# EAGLE board SparkFun_USB_LiPolyCharger_SingleCell_Panel_v20 (EAGLE 6.5.0)
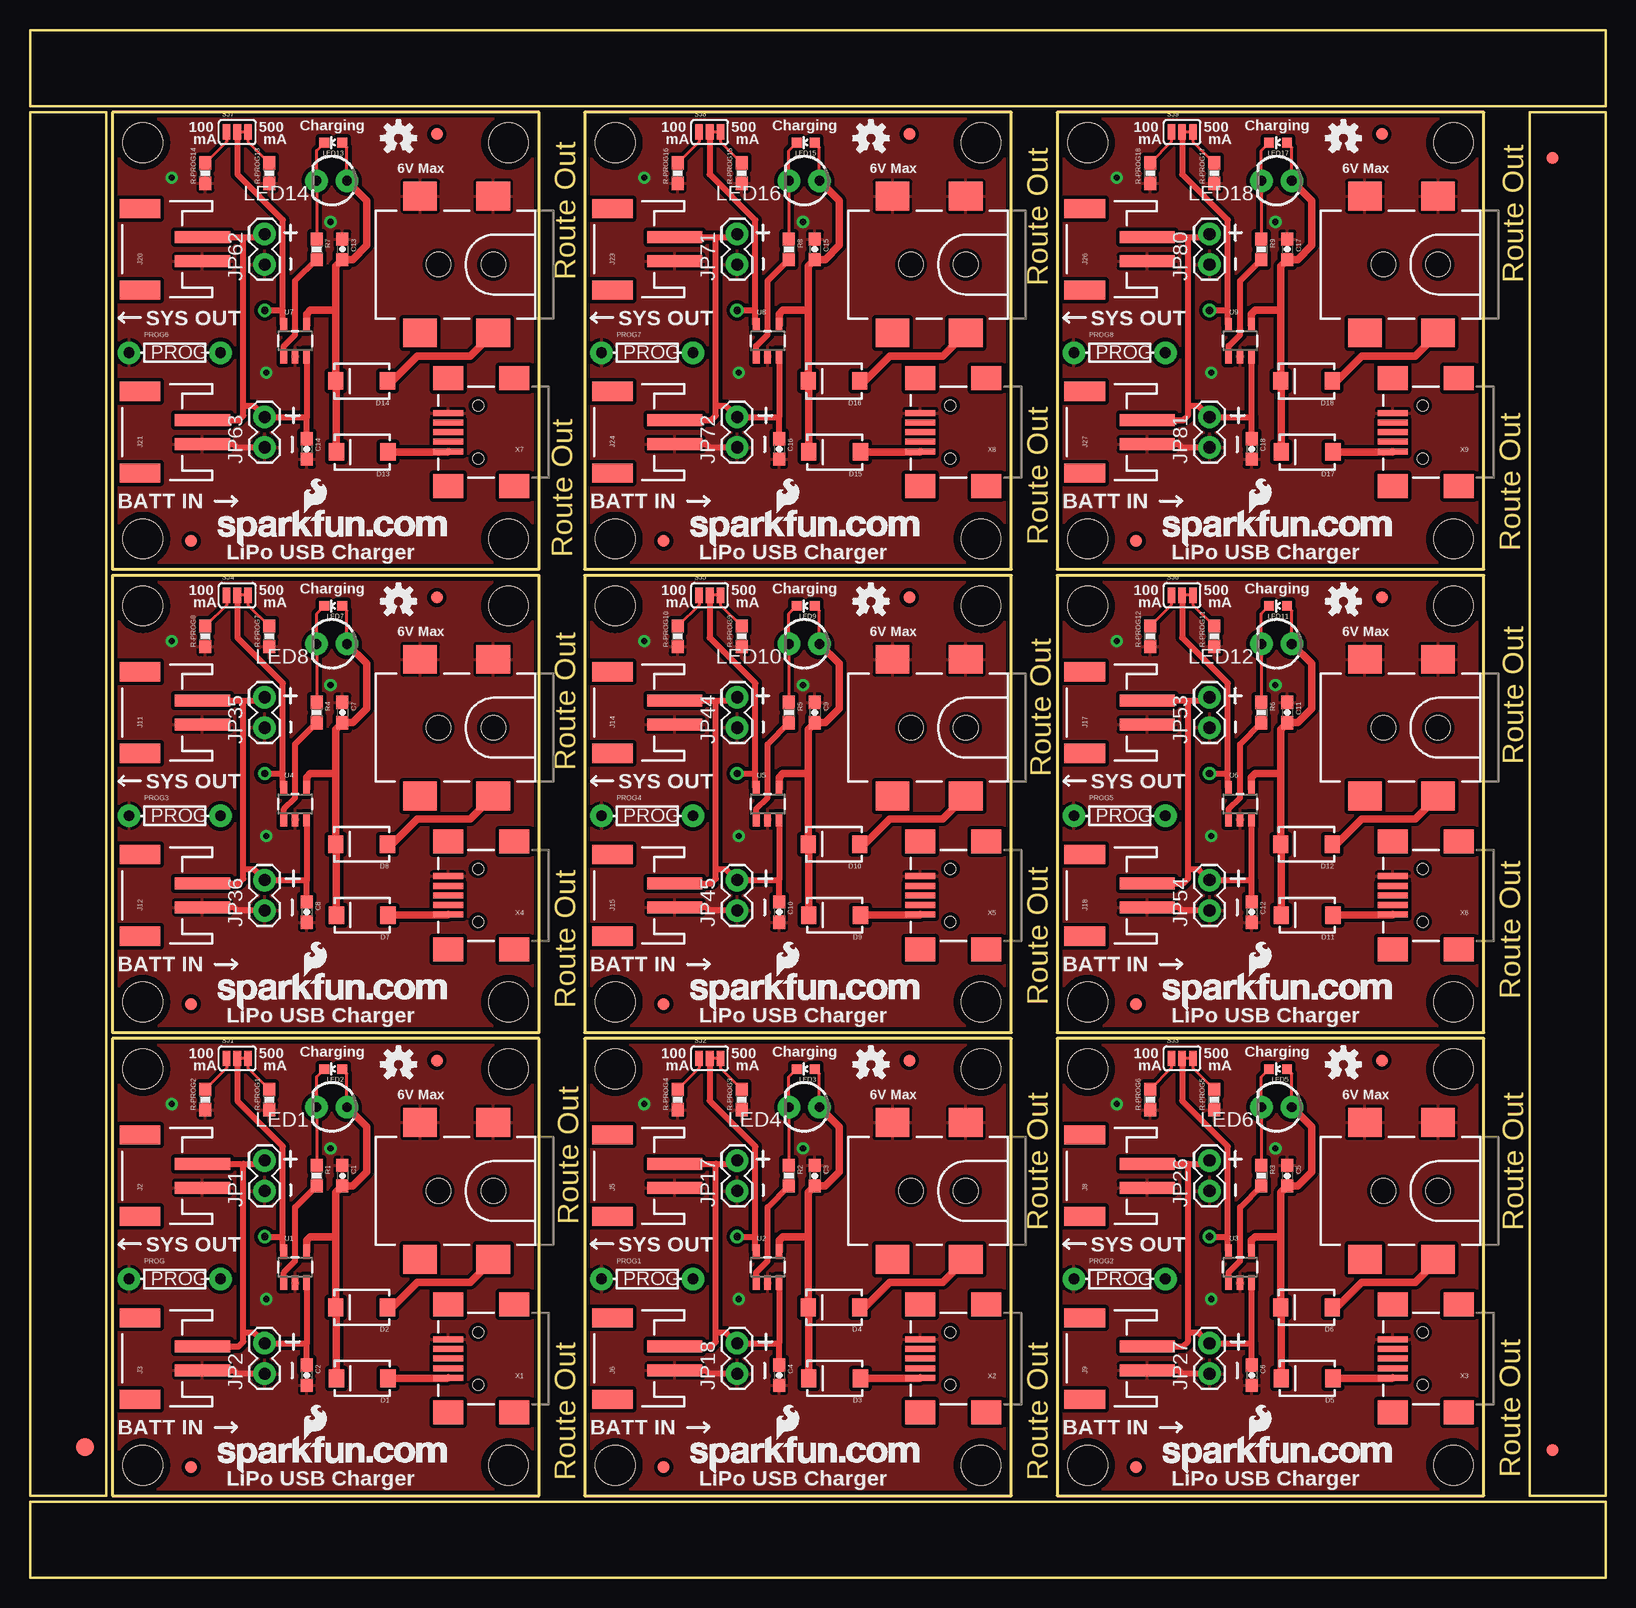
[diagram p0: board, top side]
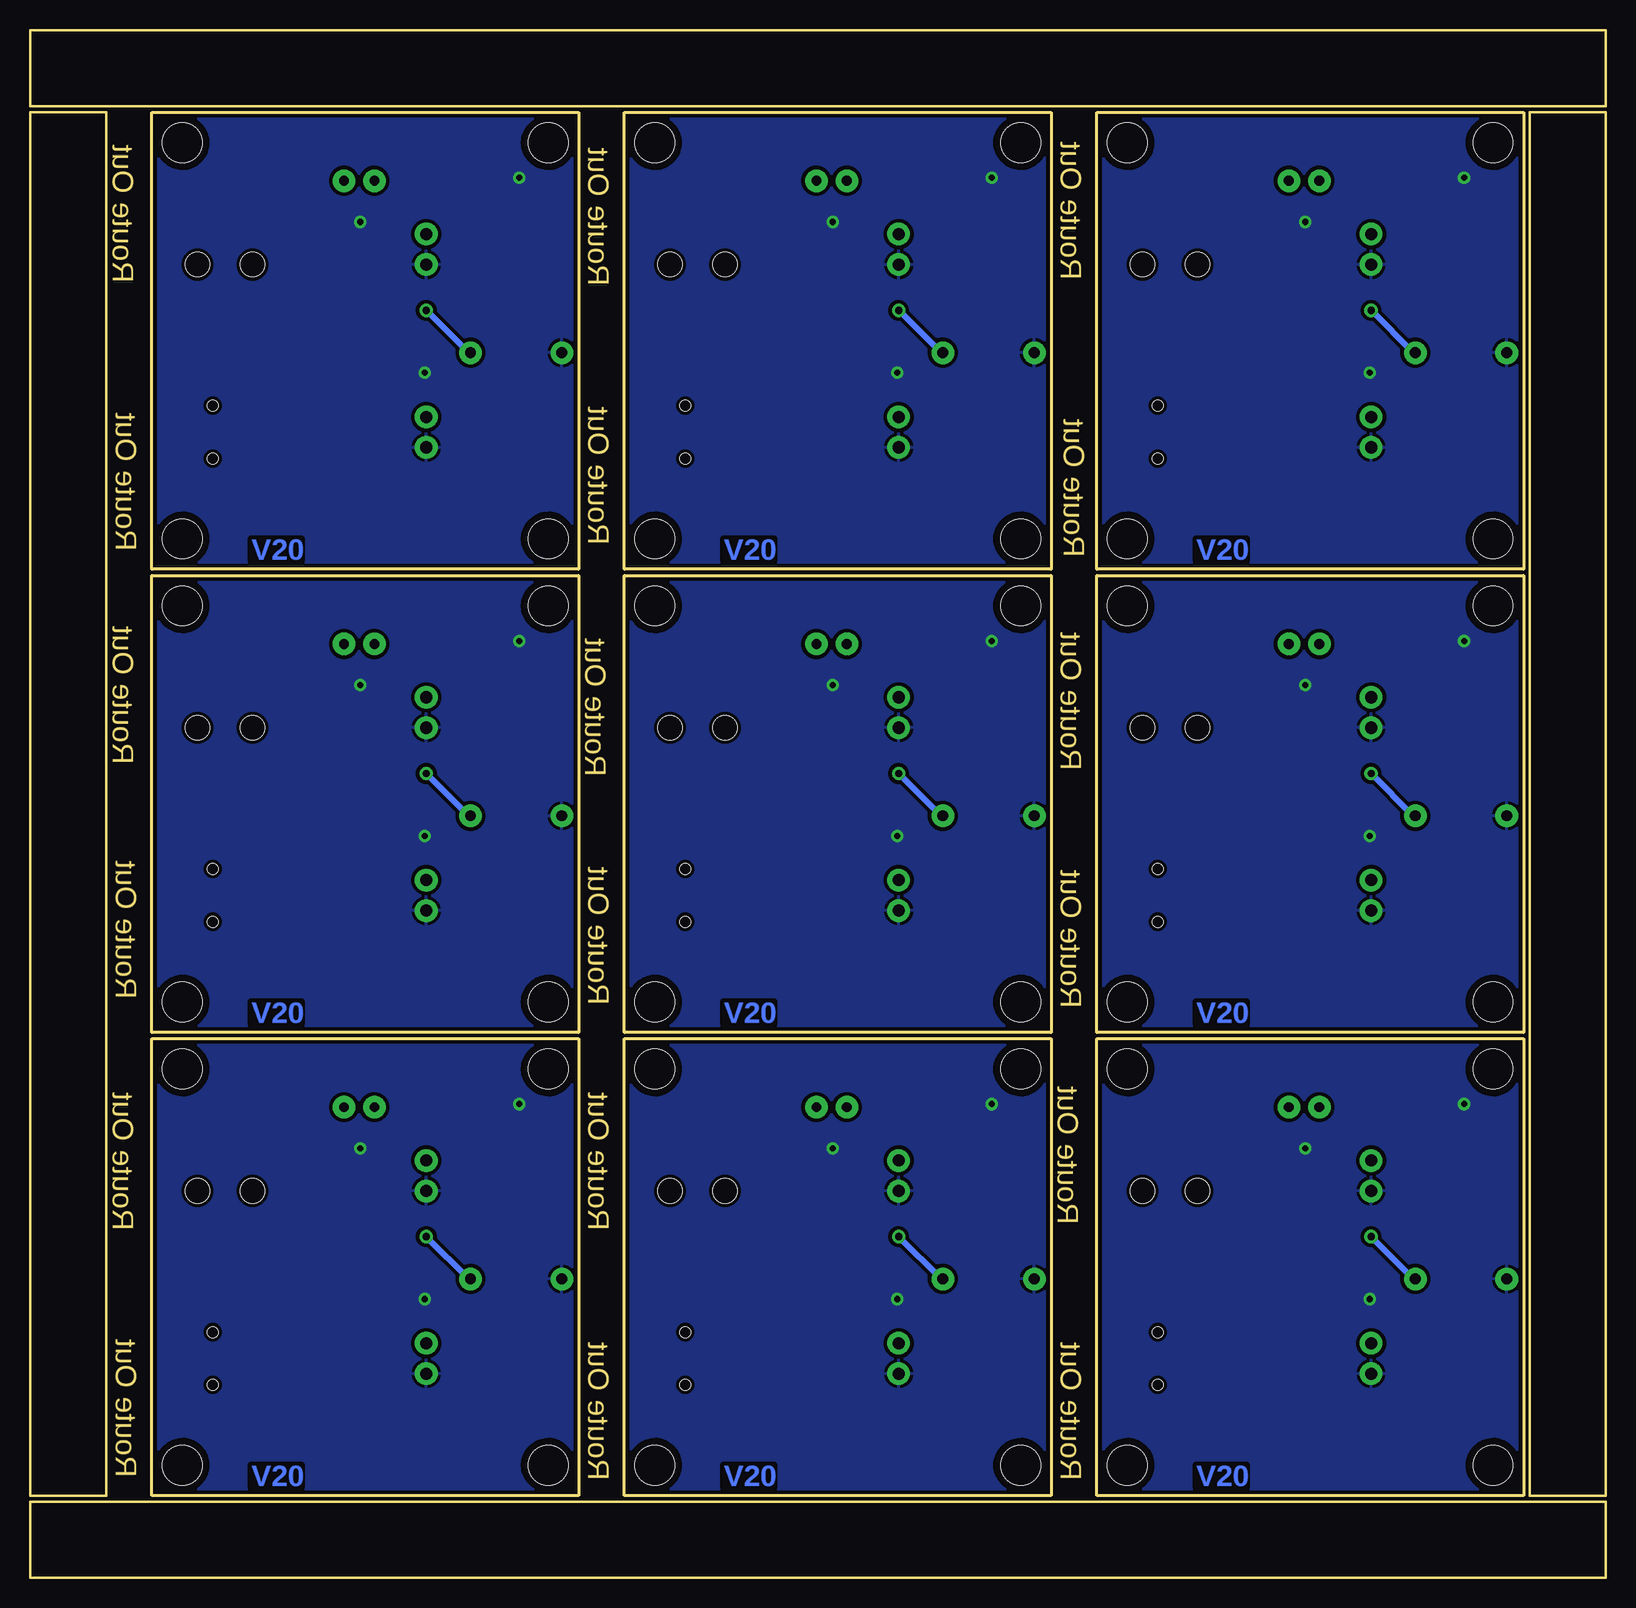
[diagram p1: board, bottom side, seen from below]

Size 131.32 x 129.03 mm. Coordinates in mm from the lower left corner, seen from the top.
Outline: 6.86,6.86 42.42,6.86 42.42,44.96 6.86,44.96 6.86,6.86
Outline: 46.23,6.86 81.79,6.86 81.79,44.96 46.23,44.96 46.23,6.86
Outline: 85.6,6.86 121.16,6.86 121.16,44.96 85.6,44.96 85.6,6.86
Outline: 6.86,45.47 42.42,45.47 42.42,83.57 6.86,83.57 6.86,45.47
Outline: 46.23,45.47 81.79,45.47 81.79,83.57 46.23,83.57 46.23,45.47
Outline: 85.6,45.47 121.16,45.47 121.16,83.57 85.6,83.57 85.6,45.47
Outline: 6.86,84.07 42.42,84.07 42.42,122.17 6.86,122.17 6.86,84.07
Outline: 46.23,84.07 81.79,84.07 81.79,122.17 46.23,122.17 46.23,84.07
Outline: 85.6,84.07 121.16,84.07 121.16,122.17 85.6,122.17 85.6,84.07
Outline: 6.35,6.86 6.35,122.17 0,122.17 0,6.86 6.35,6.86
Outline: 0,0 131.32,0 131.32,6.35 0,6.35 0,0
Outline: 131.32,6.86 131.32,122.17 124.97,122.17 124.97,6.86 131.32,6.86
Outline: 131.32,129.03 0,129.03 0,122.68 131.32,122.68 131.32,129.03
Copper layers (1*16): Top 0.035mm / dielectric 1.5mm / Bottom 0.035mm
Design rules "SparkFun *": minimum track width 8mil, minimum drill 20mil, track to track 8mil, track to pad 8mil, pad to pad 8mil, via to via 8mil, smd to smd 8mil, copper to edge 8mil, drill to drill 8mil, minimum pad ring 12mil, minimum via ring 10mil, stop-mask expansion 4mil, vias tented up to drill 20mil, thermal gap 10mil

## Footprints (pad centres in the part's own frame; a part is rotated, then mirrored left to right if it is on the bottom)
0603-CAP = smd 1.1 x 1: 1 -0.85,0; 2 0.85,0
SMA-DIODE = smd 1.27 x 1.47: A -2.15,0; C 2.15,0
FIDUCIAL-1.5X3 = smd 1.5 x 1.5: 1 0,0
FIDUCIAL-1X2 = smd 1 x 1: 1 0,0
POWER_JACK_SMD = smd 2.8 x 2.4: GND 0,-5.7; P$4 6.1,-5.7; VIN0 0,5.7; VIN1 6.1,5.7 | hole 2.032: 0,0; 4.572,0
JST-2-SMD = smd 1 x 4.6: 1 -1,-3.7; 2 1,-3.7 | smd 1.6 x 3.4: NC1 -3.4,1.5; NC2 3.4,1.5
1X02 = drill 1.016 pad 1.88: 1 0,0; 2 2.54,0
STAND-OFF = hole 3.302: 0,0
LED3MM = drill 0.813 pad 1.88: A -1.27,0; K 1.27,0
LED-0603 = smd 0.8 x 0.8: A 0,-0.75; C 0,0.75
AXIAL-0.3 = drill 0.9 pad 1.88: P$1 -3.81,0; P$2 3.81,0
0603-RES = smd 1.1 x 1: 1 -0.85,0; 2 0.85,0
SJ_3 = smd 0.635 x 1.27: 1 -0.889,0; 2 0,0; 3 0.889,0
SOT23-5 = smd 0.55 x 1.2: 1 -0.95,-1.3; 2 0,-1.3; 3 0.95,-1.3; 4 0.95,1.3; 5 -0.95,1.3
USB-MINIB = smd 2.5 x 0.5: D+ 2.5,0; D- 2.5,0.8; GND 2.5,-1.6; ID 2.5,-0.8; VBUS 2.5,1.6 | smd 2.5 x 2: MTN1 -3,4.5; MTN2 2.5,4.5; MTN3 -3,-4.5; MTN4 2.5,-4.5 | hole 0.9: 0,2.2; 0,-2.2

## Placement (x,y rotation side)
C1  4.7uF  [0603-CAP]  26.04,33.53 270 top
C2  4.7uF  [0603-CAP]  23.06,16.89 270 top
C3  4.7uF  [0603-CAP]  65.41,33.53 270 top
C4  4.7uF  [0603-CAP]  62.43,16.89 270 top
C5  4.7uF  [0603-CAP]  104.78,33.53 270 top
C6  4.7uF  [0603-CAP]  101.8,16.89 270 top
C7  4.7uF  [0603-CAP]  26.04,72.14 270 top
C8  4.7uF  [0603-CAP]  23.06,55.5 270 top
C9  4.7uF  [0603-CAP]  65.41,72.14 270 top
C10  4.7uF  [0603-CAP]  62.43,55.5 270 top
C11  4.7uF  [0603-CAP]  104.78,72.14 270 top
C12  4.7uF  [0603-CAP]  101.8,55.5 270 top
C13  4.7uF  [0603-CAP]  26.04,110.74 270 top
C14  4.7uF  [0603-CAP]  23.06,94.11 270 top
C15  4.7uF  [0603-CAP]  65.41,110.74 270 top
C16  4.7uF  [0603-CAP]  62.43,94.11 270 top
C17  4.7uF  [0603-CAP]  104.78,110.74 270 top
C18  4.7uF  [0603-CAP]  101.8,94.11 270 top
D1  MBRA140  [SMA-DIODE]  27.69,16.64 180 top
D2  MBRA140  [SMA-DIODE]  27.64,22.56 180 top
D3  MBRA140  [SMA-DIODE]  67.06,16.64 180 top
D4  MBRA140  [SMA-DIODE]  67.01,22.56 180 top
D5  MBRA140  [SMA-DIODE]  106.43,16.64 180 top
D6  MBRA140  [SMA-DIODE]  106.38,22.56 180 top
D7  MBRA140  [SMA-DIODE]  27.69,55.24 180 top
D8  MBRA140  [SMA-DIODE]  27.64,61.16 180 top
D9  MBRA140  [SMA-DIODE]  67.06,55.24 180 top
D10  MBRA140  [SMA-DIODE]  67.01,61.16 180 top
D11  MBRA140  [SMA-DIODE]  106.43,55.24 180 top
D12  MBRA140  [SMA-DIODE]  106.38,61.16 180 top
D13  MBRA140  [SMA-DIODE]  27.69,93.85 180 top
D14  MBRA140  [SMA-DIODE]  27.64,99.77 180 top
D15  MBRA140  [SMA-DIODE]  67.06,93.85 180 top
D16  MBRA140  [SMA-DIODE]  67.01,99.77 180 top
D17  MBRA140  [SMA-DIODE]  106.43,93.85 180 top
D18  MBRA140  [SMA-DIODE]  106.38,99.77 180 top
E$1  [FIDUCIAL-1.5X3]  4.57,10.92 0 top
E$4  [FIDUCIAL-1X2]  126.87,10.67 0 top
E$5  [FIDUCIAL-1X2]  126.87,118.36 180 top
J1  POWER_JACKSMD  [POWER_JACK_SMD]  38.61,32.26 180 top
J2  [JST-2-SMD]  10.67,33.53 90 top
J3  [JST-2-SMD]  10.67,18.29 90 top
J4  POWER_JACKSMD  [POWER_JACK_SMD]  77.98,32.26 180 top
J5  [JST-2-SMD]  50.04,33.53 90 top
J6  [JST-2-SMD]  50.04,18.29 90 top
J7  POWER_JACKSMD  [POWER_JACK_SMD]  117.35,32.26 180 top
J8  [JST-2-SMD]  89.41,33.53 90 top
J9  [JST-2-SMD]  89.41,18.29 90 top
J10  POWER_JACKSMD  [POWER_JACK_SMD]  38.61,70.87 180 top
J11  [JST-2-SMD]  10.67,72.14 90 top
J12  [JST-2-SMD]  10.67,56.9 90 top
J13  POWER_JACKSMD  [POWER_JACK_SMD]  77.98,70.87 180 top
J14  [JST-2-SMD]  50.04,72.14 90 top
J15  [JST-2-SMD]  50.04,56.9 90 top
J16  POWER_JACKSMD  [POWER_JACK_SMD]  117.35,70.87 180 top
J17  [JST-2-SMD]  89.41,72.14 90 top
J18  [JST-2-SMD]  89.41,56.9 90 top
J19  POWER_JACKSMD  [POWER_JACK_SMD]  38.61,109.47 180 top
J20  [JST-2-SMD]  10.67,110.74 90 top
J21  [JST-2-SMD]  10.67,95.5 90 top
J22  POWER_JACKSMD  [POWER_JACK_SMD]  77.98,109.47 180 top
J23  [JST-2-SMD]  50.04,110.74 90 top
J24  [JST-2-SMD]  50.04,95.5 90 top
J25  POWER_JACKSMD  [POWER_JACK_SMD]  117.35,109.47 180 top
J26  [JST-2-SMD]  89.41,110.74 90 top
J27  [JST-2-SMD]  89.41,95.5 90 top
JP1  M02PTH  [1X02]  19.56,32.26 90 top
JP2  M02PTH  [1X02]  19.56,17.02 90 top
JP3  STAND-OFF  [STAND-OFF]  48.77,42.42 0 top
JP4  STAND-OFF  [STAND-OFF]  79.25,42.42 0 top
JP5  STAND-OFF  [STAND-OFF]  79.25,9.4 0 top
JP6  STAND-OFF  [STAND-OFF]  48.77,9.4 0 top
JP7  STAND-OFF  [STAND-OFF]  39.88,9.4 0 top
JP8  STAND-OFF  [STAND-OFF]  9.4,42.42 0 top
JP9  STAND-OFF  [STAND-OFF]  9.4,9.4 0 top
JP10  STAND-OFF  [STAND-OFF]  39.88,42.42 0 top
JP11  LOGO-SFENEW  [SFE-NEW-WEBLOGO]  15.65,8.69 0 top
JP12  FIDUCIAL1X2  [FIDUCIAL-1X2]  13.44,9.22 0 top
JP13  FIDUCIAL1X2  [FIDUCIAL-1X2]  33.91,43.13 0 top
JP14  LOGO-SFENEW  [SFE-NEW-WEBLOGO]  55.02,8.69 0 top
JP15  FIDUCIAL1X2  [FIDUCIAL-1X2]  52.81,9.22 0 top
JP16  FIDUCIAL1X2  [FIDUCIAL-1X2]  73.28,43.13 0 top
JP17  M02PTH  [1X02]  58.93,32.26 90 top
JP18  M02PTH  [1X02]  58.93,17.02 90 top
JP19  STAND-OFF  [STAND-OFF]  88.14,42.42 0 top
JP20  STAND-OFF  [STAND-OFF]  118.62,42.42 0 top
JP21  STAND-OFF  [STAND-OFF]  118.62,9.4 0 top
JP22  STAND-OFF  [STAND-OFF]  88.14,9.4 0 top
JP23  LOGO-SFENEW  [SFE-NEW-WEBLOGO]  94.39,8.69 0 top
JP24  FIDUCIAL1X2  [FIDUCIAL-1X2]  92.18,9.22 0 top
JP25  FIDUCIAL1X2  [FIDUCIAL-1X2]  112.65,43.13 0 top
JP26  M02PTH  [1X02]  98.3,32.26 90 top
JP27  M02PTH  [1X02]  98.3,17.02 90 top
JP28  STAND-OFF  [STAND-OFF]  9.4,81.03 0 top
JP29  STAND-OFF  [STAND-OFF]  39.88,81.03 0 top
JP30  STAND-OFF  [STAND-OFF]  39.88,48.01 0 top
JP31  STAND-OFF  [STAND-OFF]  9.4,48.01 0 top
JP32  LOGO-SFENEW  [SFE-NEW-WEBLOGO]  15.65,47.29 0 top
JP33  FIDUCIAL1X2  [FIDUCIAL-1X2]  13.44,47.83 0 top
JP34  FIDUCIAL1X2  [FIDUCIAL-1X2]  33.91,81.74 0 top
JP35  M02PTH  [1X02]  19.56,70.87 90 top
JP36  M02PTH  [1X02]  19.56,55.63 90 top
JP37  STAND-OFF  [STAND-OFF]  48.77,81.03 0 top
JP38  STAND-OFF  [STAND-OFF]  79.25,81.03 0 top
JP39  STAND-OFF  [STAND-OFF]  79.25,48.01 0 top
JP40  STAND-OFF  [STAND-OFF]  48.77,48.01 0 top
JP41  LOGO-SFENEW  [SFE-NEW-WEBLOGO]  55.02,47.29 0 top
JP42  FIDUCIAL1X2  [FIDUCIAL-1X2]  52.81,47.83 0 top
JP43  FIDUCIAL1X2  [FIDUCIAL-1X2]  73.28,81.74 0 top
JP44  M02PTH  [1X02]  58.93,70.87 90 top
JP45  M02PTH  [1X02]  58.93,55.63 90 top
JP46  STAND-OFF  [STAND-OFF]  88.14,81.03 0 top
JP47  STAND-OFF  [STAND-OFF]  118.62,81.03 0 top
JP48  STAND-OFF  [STAND-OFF]  118.62,48.01 0 top
JP49  STAND-OFF  [STAND-OFF]  88.14,48.01 0 top
JP50  LOGO-SFENEW  [SFE-NEW-WEBLOGO]  94.39,47.29 0 top
JP51  FIDUCIAL1X2  [FIDUCIAL-1X2]  92.18,47.83 0 top
JP52  FIDUCIAL1X2  [FIDUCIAL-1X2]  112.65,81.74 0 top
JP53  M02PTH  [1X02]  98.3,70.87 90 top
JP54  M02PTH  [1X02]  98.3,55.63 90 top
JP55  STAND-OFF  [STAND-OFF]  9.4,119.63 0 top
JP56  STAND-OFF  [STAND-OFF]  39.88,119.63 0 top
JP57  STAND-OFF  [STAND-OFF]  39.88,86.61 0 top
JP58  STAND-OFF  [STAND-OFF]  9.4,86.61 0 top
JP59  LOGO-SFENEW  [SFE-NEW-WEBLOGO]  15.65,85.9 0 top
JP60  FIDUCIAL1X2  [FIDUCIAL-1X2]  13.44,86.44 0 top
JP61  FIDUCIAL1X2  [FIDUCIAL-1X2]  33.91,120.35 0 top
JP62  M02PTH  [1X02]  19.56,109.47 90 top
JP63  M02PTH  [1X02]  19.56,94.23 90 top
JP64  STAND-OFF  [STAND-OFF]  48.77,119.63 0 top
JP65  STAND-OFF  [STAND-OFF]  79.25,119.63 0 top
JP66  STAND-OFF  [STAND-OFF]  79.25,86.61 0 top
JP67  STAND-OFF  [STAND-OFF]  48.77,86.61 0 top
JP68  LOGO-SFENEW  [SFE-NEW-WEBLOGO]  55.02,85.9 0 top
JP69  FIDUCIAL1X2  [FIDUCIAL-1X2]  52.81,86.44 0 top
JP70  FIDUCIAL1X2  [FIDUCIAL-1X2]  73.28,120.35 0 top
JP71  M02PTH  [1X02]  58.93,109.47 90 top
JP72  M02PTH  [1X02]  58.93,94.23 90 top
JP73  STAND-OFF  [STAND-OFF]  88.14,119.63 0 top
JP74  STAND-OFF  [STAND-OFF]  118.62,119.63 0 top
JP75  STAND-OFF  [STAND-OFF]  118.62,86.61 0 top
JP76  STAND-OFF  [STAND-OFF]  88.14,86.61 0 top
JP77  LOGO-SFENEW  [SFE-NEW-WEBLOGO]  94.39,85.9 0 top
JP78  FIDUCIAL1X2  [FIDUCIAL-1X2]  92.18,86.44 0 top
JP79  FIDUCIAL1X2  [FIDUCIAL-1X2]  112.65,120.35 0 top
JP80  M02PTH  [1X02]  98.3,109.47 90 top
JP81  M02PTH  [1X02]  98.3,94.23 90 top
LED1  DNP  [LED3MM]  25.15,39.24 180 top
LED2  RED  [LED-0603]  25.27,42.42 90 top
LED3  RED  [LED-0603]  64.64,42.42 90 top
LED4  DNP  [LED3MM]  64.52,39.24 180 top
LED5  RED  [LED-0603]  104.01,42.42 90 top
LED6  DNP  [LED3MM]  103.89,39.24 180 top
LED7  RED  [LED-0603]  25.27,81.03 90 top
LED8  DNP  [LED3MM]  25.15,77.85 180 top
LED9  RED  [LED-0603]  64.64,81.03 90 top
LED10  DNP  [LED3MM]  64.52,77.85 180 top
LED11  RED  [LED-0603]  104.01,81.03 90 top
LED12  DNP  [LED3MM]  103.89,77.85 180 top
LED13  RED  [LED-0603]  25.27,119.63 90 top
LED14  DNP  [LED3MM]  25.15,116.46 180 top
LED15  RED  [LED-0603]  64.64,119.63 90 top
LED16  DNP  [LED3MM]  64.52,116.46 180 top
LED17  RED  [LED-0603]  104.01,119.63 90 top
LED18  DNP  [LED3MM]  103.89,116.46 180 top
LOGO1  OSHW-LOGOS  [OSHW-LOGO-S]  30.71,42.8 0 top
LOGO2  OSHW-LOGOS  [OSHW-LOGO-S]  70.08,42.8 0 top
LOGO3  OSHW-LOGOS  [OSHW-LOGO-S]  109.45,42.8 0 top
LOGO4  OSHW-LOGOS  [OSHW-LOGO-S]  30.71,81.41 0 top
LOGO5  OSHW-LOGOS  [OSHW-LOGO-S]  70.08,81.41 0 top
LOGO6  OSHW-LOGOS  [OSHW-LOGO-S]  109.45,81.41 0 top
LOGO7  OSHW-LOGOS  [OSHW-LOGO-S]  30.71,120.02 0 top
LOGO8  OSHW-LOGOS  [OSHW-LOGO-S]  70.08,120.02 0 top
LOGO9  OSHW-LOGOS  [OSHW-LOGO-S]  109.45,120.02 0 top
PROG  [AXIAL-0.3]  12.06,24.92 0 top
PROG1  [AXIAL-0.3]  51.44,24.92 0 top
PROG2  [AXIAL-0.3]  90.81,24.92 0 top
PROG3  [AXIAL-0.3]  12.06,63.53 0 top
PROG4  [AXIAL-0.3]  51.44,63.53 0 top
PROG5  [AXIAL-0.3]  90.81,63.53 0 top
PROG6  [AXIAL-0.3]  12.06,102.13 0 top
PROG7  [AXIAL-0.3]  51.44,102.13 0 top
PROG8  [AXIAL-0.3]  90.81,102.13 0 top
R1  330  [0603-RES]  23.88,33.53 270 top
R2  330  [0603-RES]  63.25,33.53 270 top
R3  330  [0603-RES]  102.62,33.53 270 top
R4  330  [0603-RES]  23.88,72.14 270 top
R5  330  [0603-RES]  63.25,72.14 270 top
R6  330  [0603-RES]  102.62,72.14 270 top
R7  330  [0603-RES]  23.88,110.74 270 top
R8  330  [0603-RES]  63.25,110.74 270 top
R9  330  [0603-RES]  102.62,110.74 270 top
R-PROG1  2k  [0603-RES]  19.94,39.88 90 top
R-PROG2  10k  [0603-RES]  14.61,39.88 90 top
R-PROG3  2k  [0603-RES]  59.31,39.88 90 top
R-PROG4  10k  [0603-RES]  53.98,39.88 90 top
R-PROG5  2k  [0603-RES]  98.68,39.88 90 top
R-PROG6  10k  [0603-RES]  93.34,39.88 90 top
R-PROG7  2k  [0603-RES]  19.94,78.49 90 top
R-PROG8  10k  [0603-RES]  14.61,78.49 90 top
R-PROG9  2k  [0603-RES]  59.31,78.49 90 top
R-PROG10  10k  [0603-RES]  53.98,78.49 90 top
R-PROG11  2k  [0603-RES]  98.68,78.49 90 top
R-PROG12  10k  [0603-RES]  93.34,78.49 90 top
R-PROG13  2k  [0603-RES]  19.94,117.09 90 top
R-PROG14  10k  [0603-RES]  14.61,117.09 90 top
R-PROG15  2k  [0603-RES]  59.31,117.09 90 top
R-PROG16  10k  [0603-RES]  53.98,117.09 90 top
R-PROG17  2k  [0603-RES]  98.68,117.09 90 top
R-PROG18  10k  [0603-RES]  93.34,117.09 90 top
SJ1  [SJ_3]  17.27,43.31 0 top
SJ2  [SJ_3]  56.64,43.31 0 top
SJ3  [SJ_3]  96.01,43.31 0 top
SJ4  [SJ_3]  17.27,81.92 0 top
SJ5  [SJ_3]  56.64,81.92 0 top
SJ6  [SJ_3]  96.01,81.92 0 top
SJ7  [SJ_3]  17.27,120.52 0 top
SJ8  [SJ_3]  56.64,120.52 0 top
SJ9  [SJ_3]  96.01,120.52 0 top
U1  MCP73831  [SOT23-5]  22.1,25.91 0 top
U2  MCP73831  [SOT23-5]  61.47,25.91 0 top
U3  MCP73831  [SOT23-5]  100.84,25.91 0 top
U4  MCP73831  [SOT23-5]  22.1,64.52 0 top
U5  MCP73831  [SOT23-5]  61.47,64.52 0 top
U6  MCP73831  [SOT23-5]  100.84,64.52 0 top
U7  MCP73831  [SOT23-5]  22.1,103.12 0 top
U8  MCP73831  [SOT23-5]  61.47,103.12 0 top
U9  MCP73831  [SOT23-5]  100.84,103.12 0 top
X1  USBSMD  [USB-MINIB]  37.34,18.29 180 top
X2  USBSMD  [USB-MINIB]  76.71,18.29 180 top
X3  USBSMD  [USB-MINIB]  116.08,18.29 180 top
X4  USBSMD  [USB-MINIB]  37.34,56.9 180 top
X5  USBSMD  [USB-MINIB]  76.71,56.9 180 top
X6  USBSMD  [USB-MINIB]  116.08,56.9 180 top
X7  USBSMD  [USB-MINIB]  37.34,95.5 180 top
X8  USBSMD  [USB-MINIB]  76.71,95.5 180 top
X9  USBSMD  [USB-MINIB]  116.08,95.5 180 top

## Library data of the parts
C1-C18 = SparkFun-Capacitors; PROD_ID: CAP-08280
D1-D18 = SparkFun-DiscreteSemi; PROD_ID: DIO-08053
E$1 E$4 E$5 LOGO1-LOGO9 = SparkFun-Aesthetics
J1 J4 J7 J10 J13 J16 J19 J22 J25 = SparkFun-Connectors; PROD_ID: CONN-08106; VALUE: 5.5x2.1mm Barrel
J2 J3 J5 J6 J8 J9 J11 J12 J14 J15 J17 J18 J20 J21 J23 J24 J26 J27 = SparkFun-Connectors; PROD_ID: CONN-08352
JP1 JP2 JP17 JP18 JP26 JP27 JP35 JP36 JP44 JP45 JP53 JP54 JP62 JP63 JP71 JP72 JP80 JP81 X1-X9 = SparkFun-Connectors
JP3-JP16 JP19-JP25 JP28-JP34 JP37-JP43 JP46-JP52 JP55-JP61 JP64-JP70 JP73-JP79 LED1 LED4 LED6 LED8 LED10 LED12 LED14 LED16 LED18 SJ1-SJ9 = SparkFun
LED2 LED3 LED5 LED7 LED9 LED11 LED13 LED15 LED17 = SparkFun-LED; PROD_ID: DIO-00819
PROG PROG1-PROG8 = SparkFun-Resistors
R1-R9 = SparkFun-Resistors; PROD_ID: RES-00818
R-PROG1 R-PROG3 R-PROG5 R-PROG7 R-PROG9 R-PROG11 R-PROG13 R-PROG15 R-PROG17 = SparkFun-Resistors; PROD_ID: RES-08296
R-PROG2 R-PROG4 R-PROG6 R-PROG8 R-PROG10 R-PROG12 R-PROG14 R-PROG16 R-PROG18 = SparkFun-Resistors; PROD_ID: RES-00824
U1-U9 = SparkFun-PowerIC; PROD_ID: IC-09995

## Nets
GND: C1.1 C2.2 J1.GND J1.P$4 J2.1 J3.1 JP1.1 JP2.1 PROG.P$1 R-PROG1.1 R-PROG2.1 U1.2 X1.GND
GND1: C3.1 C4.2 J4.GND J4.P$4 J5.1 J6.1 JP17.1 JP18.1 PROG1.P$1 R-PROG3.1 R-PROG4.1 U2.2 X2.GND
GND2: C5.1 C6.2 J7.GND J7.P$4 J8.1 J9.1 JP26.1 JP27.1 PROG2.P$1 R-PROG5.1 R-PROG6.1 U3.2 X3.GND
GND3: C7.1 C8.2 J10.GND J10.P$4 J11.1 J12.1 JP35.1 JP36.1 PROG3.P$1 R-PROG7.1 R-PROG8.1 U4.2 X4.GND
GND4: C9.1 C10.2 J13.GND J13.P$4 J14.1 J15.1 JP44.1 JP45.1 PROG4.P$1 R-PROG9.1 R-PROG10.1 U5.2 X5.GND
GND5: C11.1 C12.2 J16.GND J16.P$4 J17.1 J18.1 JP53.1 JP54.1 PROG5.P$1 R-PROG11.1 R-PROG12.1 U6.2 X6.GND
GND6: C13.1 C14.2 J19.GND J19.P$4 J20.1 J21.1 JP62.1 JP63.1 PROG6.P$1 R-PROG13.1 R-PROG14.1 U7.2 X7.GND
GND7: C15.1 C16.2 J22.GND J22.P$4 J23.1 J24.1 JP71.1 JP72.1 PROG7.P$1 R-PROG15.1 R-PROG16.1 U8.2 X8.GND
GND8: C17.1 C18.2 J25.GND J25.P$4 J26.1 J27.1 JP80.1 JP81.1 PROG8.P$1 R-PROG17.1 R-PROG18.1 U9.2 X9.GND
N$1: C1.2 D1.C D2.C LED1.A LED2.A U1.4
N$2: R1.2 U1.1
N$3: LED1.K LED2.C R1.1
N$4: R-PROG1.2 SJ1.3
N$6: D1.A X1.VBUS
N$7: R-PROG2.2 SJ1.1
N$8: D2.A J1.VIN0
N$9: C3.2 D3.C D4.C LED3.A LED4.A U2.4
N$10: C2.1 J2.2 J3.2 JP1.2 JP2.2 U1.3
N$11: R-PROG4.2 SJ2.1
N$12: R-PROG3.2 SJ2.3
N$14: R2.2 U2.1
N$15: LED3.C LED4.K R2.1
N$16: D3.A X2.VBUS
N$17: C4.1 J5.2 J6.2 JP17.2 JP18.2 U2.3
N$18: D4.A J4.VIN0
N$19: C5.2 D5.C D6.C LED5.A LED6.A U3.4
N$20: R-PROG6.2 SJ3.1
N$21: R-PROG5.2 SJ3.3
N$23: R3.2 U3.1
N$24: LED5.C LED6.K R3.1
N$25: D5.A X3.VBUS
N$26: C6.1 J8.2 J9.2 JP26.2 JP27.2 U3.3
N$27: D6.A J7.VIN0
N$28: C7.2 D7.C D8.C LED7.A LED8.A U4.4
N$29: R-PROG8.2 SJ4.1
N$30: R-PROG7.2 SJ4.3
N$32: R4.2 U4.1
N$33: LED7.C LED8.K R4.1
N$34: D7.A X4.VBUS
N$35: C8.1 J11.2 J12.2 JP35.2 JP36.2 U4.3
N$36: D8.A J10.VIN0
N$37: C9.2 D9.C D10.C LED9.A LED10.A U5.4
N$38: R-PROG10.2 SJ5.1
N$39: R-PROG9.2 SJ5.3
N$41: R5.2 U5.1
N$42: LED9.C LED10.K R5.1
N$43: D9.A X5.VBUS
N$44: C10.1 J14.2 J15.2 JP44.2 JP45.2 U5.3
N$45: D10.A J13.VIN0
N$46: C11.2 D11.C D12.C LED11.A LED12.A U6.4
N$47: R-PROG12.2 SJ6.1
N$48: R-PROG11.2 SJ6.3
N$50: R6.2 U6.1
N$51: LED11.C LED12.K R6.1
N$52: D11.A X6.VBUS
N$53: C12.1 J17.2 J18.2 JP53.2 JP54.2 U6.3
N$54: D12.A J16.VIN0
N$55: C13.2 D13.C D14.C LED13.A LED14.A U7.4
N$56: R-PROG14.2 SJ7.1
N$57: R-PROG13.2 SJ7.3
N$59: R7.2 U7.1
N$60: LED13.C LED14.K R7.1
N$61: D13.A X7.VBUS
N$62: C14.1 J20.2 J21.2 JP62.2 JP63.2 U7.3
N$63: D14.A J19.VIN0
N$64: C15.2 D15.C D16.C LED15.A LED16.A U8.4
N$65: R-PROG16.2 SJ8.1
N$66: R-PROG15.2 SJ8.3
N$68: R8.2 U8.1
N$69: LED15.C LED16.K R8.1
N$70: D15.A X8.VBUS
N$71: C16.1 J23.2 J24.2 JP71.2 JP72.2 U8.3
N$72: D16.A J22.VIN0
N$73: C17.2 D17.C D18.C LED17.A LED18.A U9.4
N$74: R-PROG18.2 SJ9.1
N$75: R-PROG17.2 SJ9.3
N$77: R9.2 U9.1
N$78: LED17.C LED18.K R9.1
N$79: D17.A X9.VBUS
N$80: C18.1 J26.2 J27.2 JP80.2 JP81.2 U9.3
N$81: D18.A J25.VIN0
PROG: PROG.P$2 SJ1.2 U1.5
PROG1: PROG1.P$2 SJ2.2 U2.5
PROG2: PROG2.P$2 SJ3.2 U3.5
PROG3: PROG3.P$2 SJ4.2 U4.5
PROG4: PROG4.P$2 SJ5.2 U5.5
PROG5: PROG5.P$2 SJ6.2 U6.5
PROG6: PROG6.P$2 SJ7.2 U7.5
PROG7: PROG7.P$2 SJ8.2 U8.5
PROG8: PROG8.P$2 SJ9.2 U9.5

## Tracks (layer width: path | path; a pad name or v marks a point on that pad's centre or on a via)
GND  (via drill 0.51)
  Top 0.508: JP2.1 17.27,17.02 17.02,17.27 15.88,17.27 15.75,17.14
  other vias: 25.04,35.81 11.81,39.5 19.68,23.24
  pour Bottom (isolate 0.305): 6.86,6.86 6.86,44.96 42.42,44.96 42.42,6.86
  pour Top (isolate 0.305): 6.86,6.86 6.86,44.96 42.42,44.96 42.42,6.86
GND1  (via drill 0.51)
  Top 0.508: JP18.1 56.64,17.02 56.39,17.27 55.24,17.27 55.12,17.14
  other vias: 64.41,35.81 51.18,39.5 59.05,23.24
  pour Bottom (isolate 0.305): 46.23,6.86 46.23,44.96 81.79,44.96 81.79,6.86
  pour Top (isolate 0.305): 46.23,6.86 46.23,44.96 81.79,44.96 81.79,6.86
GND2  (via drill 0.51)
  Top 0.508: JP27.1 96.01,17.02 95.76,17.27 94.61,17.27 94.49,17.14
  other vias: 103.78,35.81 90.55,39.5 98.42,23.24
  pour Bottom (isolate 0.305): 85.6,6.86 85.6,44.96 121.16,44.96 121.16,6.86
  pour Top (isolate 0.305): 85.6,6.86 85.6,44.96 121.16,44.96 121.16,6.86
GND3  (via drill 0.51)
  Top 0.508: JP36.1 17.27,55.63 17.02,55.88 15.88,55.88 15.75,55.75
  other vias: 25.04,74.42 11.81,78.11 19.68,61.85
  pour Bottom (isolate 0.305): 6.86,45.47 6.86,83.57 42.42,83.57 42.42,45.47
  pour Top (isolate 0.305): 6.86,45.47 6.86,83.57 42.42,83.57 42.42,45.47
GND4  (via drill 0.51)
  Top 0.508: JP45.1 56.64,55.63 56.39,55.88 55.24,55.88 55.12,55.75
  other vias: 64.41,74.42 51.18,78.11 59.05,61.85
  pour Bottom (isolate 0.305): 46.23,45.47 46.23,83.57 81.79,83.57 81.79,45.47
  pour Top (isolate 0.305): 46.23,45.47 46.23,83.57 81.79,83.57 81.79,45.47
GND5  (via drill 0.51)
  Top 0.508: JP54.1 96.01,55.63 95.76,55.88 94.61,55.88 94.49,55.75
  other vias: 103.78,74.42 90.55,78.11 98.42,61.85
  pour Bottom (isolate 0.305): 85.6,45.47 85.6,83.57 121.16,83.57 121.16,45.47
  pour Top (isolate 0.305): 85.6,45.47 85.6,83.57 121.16,83.57 121.16,45.47
GND6  (via drill 0.51)
  Top 0.508: JP63.1 17.27,94.23 17.02,94.49 15.88,94.49 15.75,94.36
  other vias: 25.04,113.03 11.81,116.71 19.68,100.46
  pour Bottom (isolate 0.305): 6.86,84.07 6.86,122.17 42.42,122.17 42.42,84.07
  pour Top (isolate 0.305): 6.86,84.07 6.86,122.17 42.42,122.17 42.42,84.07
GND7  (via drill 0.51)
  Top 0.508: JP72.1 56.64,94.23 56.39,94.49 55.24,94.49 55.12,94.36
  other vias: 64.41,113.03 51.18,116.71 59.05,100.46
  pour Bottom (isolate 0.305): 46.23,84.07 46.23,122.17 81.79,122.17 81.79,84.07
  pour Top (isolate 0.305): 46.23,84.07 46.23,122.17 81.79,122.17 81.79,84.07
GND8  (via drill 0.51)
  Top 0.508: JP81.1 96.01,94.23 95.76,94.49 94.61,94.49 94.49,94.36
  other vias: 103.78,113.03 90.55,116.71 98.42,100.46
  pour Bottom (isolate 0.305): 85.6,84.07 85.6,122.17 121.16,122.17 121.16,84.07
  pour Top (isolate 0.305): 85.6,84.07 85.6,122.17 121.16,122.17 121.16,84.07
N$1
  Top 0.254: LED1.A 26.42,42.02 LED2.A
  Top 0.406: 25.78,32.68 C1.2
  Top 0.61: D1.C 25.54,22.5 D2.C 25.48,28.45 | 25.48,28.45 25.48,32.13 C1.2 26.89,32.68 28.07,33.86 28.07,37.59 LED1.A | U1.4 23.05,28.13 23.37,28.45 25.48,28.45
N$2
  Top 0.508: U1.1 21.15,25.47 22.1,26.42 22.1,30.9 R1.2
N$3
  Top 0.254: LED2.C 23.88,41.77 LED1.K R1.1
N$4
  Top 0.254: 18.2,43.27 SJ1.3 18.16,42.51 R-PROG1.2
N$5
  Top 0.254: 18.29,43.31 17.14,43.31
N$6
  Top 0.61: D1.A 34.79,16.64 X1.VBUS
N$7
  Top 0.254: SJ1.1 16.38,42.51 R-PROG2.2
N$8
  Top 0.61: D2.A 30.18,22.55 32.26,24.64 36.69,24.64 J1.VIN0
N$9
  Top 0.254: LED4.A 65.79,42.02 LED3.A
  Top 0.406: 65.15,32.68 C3.2
  Top 0.61: D3.C 64.91,22.5 D4.C 64.86,28.45 | 64.86,28.45 64.86,32.13 C3.2 66.26,32.68 67.44,33.86 67.44,37.59 LED4.A | U2.4 62.42,28.13 62.74,28.45 64.86,28.45
N$10
  Top 0.508: J2.2 17.78,34.53 | 17.78,34.53 19.29,34.53 JP1.2 | J3.2 17.38,19.29 17.78,19.68 17.78,20.45 | 17.78,20.45 17.78,34.53 | 17.78,20.45 18.67,20.45 JP2.2 23.05,19.56 | U1.3 23.05,19.56 | C2.1 23.06,19.54 23.05,19.56
N$11
  Top 0.254: SJ2.1 55.75,42.51 R-PROG4.2
N$12
  Top 0.254: 57.57,43.27 SJ2.3 57.53,42.51 R-PROG3.2
N$13
  Top 0.254: 57.66,43.31 56.52,43.31
N$14
  Top 0.508: U2.1 60.52,25.47 61.47,26.42 61.47,30.9 R2.2
N$15
  Top 0.254: LED3.C 63.25,41.77 LED4.K R2.1
N$16
  Top 0.61: D3.A 74.16,16.64 X2.VBUS
N$17
  Top 0.508: J5.2 57.15,34.53 | 57.15,34.53 58.66,34.53 JP17.2 | J6.2 56.75,19.29 57.15,19.68 57.15,20.45 | 57.15,20.45 57.15,34.53 | 57.15,20.45 58.04,20.45 JP18.2 62.42,19.56 | U2.3 62.42,19.56 | C4.1 62.43,19.54 62.42,19.56
N$18
  Top 0.61: D4.A 69.55,22.55 71.63,24.64 76.06,24.64 J4.VIN0
N$19
  Top 0.254: LED6.A 105.16,42.02 LED5.A
  Top 0.406: 104.52,32.68 C5.2
  Top 0.61: D5.C 104.28,22.5 D6.C 104.22,28.45 | 104.22,28.45 104.22,32.13 C5.2 105.63,32.68 106.81,33.86 106.81,37.59 LED6.A | U3.4 101.79,28.13 102.11,28.45 104.22,28.45
N$20
  Top 0.254: SJ3.1 95.12,42.51 R-PROG6.2
N$21
  Top 0.254: 96.94,43.27 SJ3.3 96.9,42.51 R-PROG5.2
N$22
  Top 0.254: 97.03,43.31 95.89,43.31
N$23
  Top 0.508: U3.1 99.89,25.47 100.84,26.42 100.84,30.9 R3.2
N$24
  Top 0.254: LED5.C 102.62,41.77 LED6.K R3.1
N$25
  Top 0.61: D5.A 113.53,16.64 X3.VBUS
N$26
  Top 0.508: J8.2 96.52,34.53 | 96.52,34.53 98.03,34.53 JP26.2 | J9.2 96.12,19.29 96.52,19.68 96.52,20.45 | 96.52,20.45 96.52,34.53 | 96.52,20.45 97.41,20.45 JP27.2 101.79,19.56 | U3.3 101.79,19.56 | C6.1 101.8,19.54 101.79,19.56
N$27
  Top 0.61: D6.A 108.92,22.55 111,24.64 115.43,24.64 J7.VIN0
N$28
  Top 0.254: LED8.A 26.42,80.63 LED7.A
  Top 0.406: 25.78,71.29 C7.2
  Top 0.61: D7.C 25.54,61.11 D8.C 25.48,67.06 | 25.48,67.06 25.48,70.74 C7.2 26.89,71.29 28.07,72.47 28.07,76.2 LED8.A | U4.4 23.05,66.74 23.37,67.06 25.48,67.06
N$29
  Top 0.254: SJ4.1 16.38,81.11 R-PROG8.2
N$30
  Top 0.254: 18.2,81.88 SJ4.3 18.16,81.11 R-PROG7.2
N$31
  Top 0.254: 18.29,81.92 17.14,81.92
N$32
  Top 0.508: U4.1 21.15,64.07 22.1,65.02 22.1,69.51 R4.2
N$33
  Top 0.254: LED7.C 23.88,80.38 LED8.K R4.1
N$34
  Top 0.61: D7.A 34.79,55.24 X4.VBUS
N$35
  Top 0.508: J11.2 17.78,73.14 | 17.78,73.14 19.29,73.14 JP35.2 | J12.2 17.38,57.9 17.78,58.29 17.78,59.05 | 17.78,59.05 17.78,73.14 | 17.78,59.05 18.67,59.05 JP36.2 23.05,58.17 | U4.3 23.05,58.17 | C8.1 23.06,58.15 23.05,58.17
N$36
  Top 0.61: D8.A 30.18,61.16 32.26,63.25 36.69,63.25 J10.VIN0
N$37
  Top 0.254: LED10.A 65.79,80.63 LED9.A
  Top 0.406: 65.15,71.29 C9.2
  Top 0.61: D9.C 64.91,61.11 D10.C 64.86,67.06 | 64.86,67.06 64.86,70.74 C9.2 66.26,71.29 67.44,72.47 67.44,76.2 LED10.A | U5.4 62.42,66.74 62.74,67.06 64.86,67.06
N$38
  Top 0.254: SJ5.1 55.75,81.11 R-PROG10.2
N$39
  Top 0.254: 57.57,81.88 SJ5.3 57.53,81.11 R-PROG9.2
N$40
  Top 0.254: 57.66,81.92 56.52,81.92
N$41
  Top 0.508: U5.1 60.52,64.07 61.47,65.02 61.47,69.51 R5.2
N$42
  Top 0.254: LED9.C 63.25,80.38 LED10.K R5.1
N$43
  Top 0.61: D9.A 74.16,55.24 X5.VBUS
N$44
  Top 0.508: J14.2 57.15,73.14 | 57.15,73.14 58.66,73.14 JP44.2 | J15.2 56.75,57.9 57.15,58.29 57.15,59.05 | 57.15,59.05 57.15,73.14 | 57.15,59.05 58.04,59.05 JP45.2 62.42,58.17 | U5.3 62.42,58.17 | C10.1 62.43,58.15 62.42,58.17
N$45
  Top 0.61: D10.A 69.55,61.16 71.63,63.25 76.06,63.25 J13.VIN0
N$46
  Top 0.254: LED12.A 105.16,80.63 LED11.A
  Top 0.406: 104.52,71.29 C11.2
  Top 0.61: D11.C 104.28,61.11 D12.C 104.22,67.06 | 104.22,67.06 104.22,70.74 C11.2 105.63,71.29 106.81,72.47 106.81,76.2 LED12.A | U6.4 101.79,66.74 102.11,67.06 104.22,67.06
N$47
  Top 0.254: SJ6.1 95.12,81.11 R-PROG12.2
N$48
  Top 0.254: 96.94,81.88 SJ6.3 96.9,81.11 R-PROG11.2
N$49
  Top 0.254: 97.03,81.92 95.89,81.92
N$50
  Top 0.508: U6.1 99.89,64.07 100.84,65.02 100.84,69.51 R6.2
N$51
  Top 0.254: LED11.C 102.62,80.38 LED12.K R6.1
N$52
  Top 0.61: D11.A 113.53,55.24 X6.VBUS
N$53
  Top 0.508: J17.2 96.52,73.14 | 96.52,73.14 98.03,73.14 JP53.2 | J18.2 96.12,57.9 96.52,58.29 96.52,59.05 | 96.52,59.05 96.52,73.14 | 96.52,59.05 97.41,59.05 JP54.2 101.79,58.17 | U6.3 101.79,58.17 | C12.1 101.8,58.15 101.79,58.17
N$54
  Top 0.61: D12.A 108.92,61.16 111,63.25 115.43,63.25 J16.VIN0
N$55
  Top 0.254: LED14.A 26.42,119.24 LED13.A
  Top 0.406: 25.78,109.89 C13.2
  Top 0.61: D13.C 25.54,99.72 D14.C 25.48,105.66 | 25.48,105.66 25.48,109.34 C13.2 26.89,109.89 28.07,111.07 28.07,114.81 LED14.A | U7.4 23.05,105.34 23.37,105.66 25.48,105.66
N$56
  Top 0.254: SJ7.1 16.38,119.72 R-PROG14.2
N$57
  Top 0.254: 18.2,120.48 SJ7.3 18.16,119.72 R-PROG13.2
N$58
  Top 0.254: 18.29,120.52 17.14,120.52
N$59
  Top 0.508: U7.1 21.15,102.68 22.1,103.63 22.1,108.12 R7.2
N$60
  Top 0.254: LED13.C 23.88,118.99 LED14.K R7.1
N$61
  Top 0.61: D13.A 34.79,93.85 X7.VBUS
N$62
  Top 0.508: J20.2 17.78,111.74 | 17.78,111.74 19.29,111.74 JP62.2 | J21.2 17.38,96.5 17.78,96.9 17.78,97.66 | 17.78,97.66 17.78,111.74 | 17.78,97.66 18.67,97.66 JP63.2 23.05,96.77 | U7.3 23.05,96.77 | C14.1 23.06,96.76 23.05,96.77
N$63
  Top 0.61: D14.A 30.18,99.77 32.26,101.85 36.69,101.85 J19.VIN0
N$64
  Top 0.254: LED16.A 65.79,119.24 LED15.A
  Top 0.406: 65.15,109.89 C15.2
  Top 0.61: D15.C 64.91,99.72 D16.C 64.86,105.66 | 64.86,105.66 64.86,109.34 C15.2 66.26,109.89 67.44,111.07 67.44,114.81 LED16.A | U8.4 62.42,105.34 62.74,105.66 64.86,105.66
N$65
  Top 0.254: SJ8.1 55.75,119.72 R-PROG16.2
N$66
  Top 0.254: 57.57,120.48 SJ8.3 57.53,119.72 R-PROG15.2
N$67
  Top 0.254: 57.66,120.52 56.52,120.52
N$68
  Top 0.508: U8.1 60.52,102.68 61.47,103.63 61.47,108.12 R8.2
N$69
  Top 0.254: LED15.C 63.25,118.99 LED16.K R8.1
N$70
  Top 0.61: D15.A 74.16,93.85 X8.VBUS
N$71
  Top 0.508: J23.2 57.15,111.74 | 57.15,111.74 58.66,111.74 JP71.2 | J24.2 56.75,96.5 57.15,96.9 57.15,97.66 | 57.15,97.66 57.15,111.74 | 57.15,97.66 58.04,97.66 JP72.2 62.42,96.77 | U8.3 62.42,96.77 | C16.1 62.43,96.76 62.42,96.77
N$72
  Top 0.61: D16.A 69.55,99.77 71.63,101.85 76.06,101.85 J22.VIN0
N$73
  Top 0.254: LED18.A 105.16,119.24 LED17.A
  Top 0.406: 104.52,109.89 C17.2
  Top 0.61: D17.C 104.28,99.72 D18.C 104.22,105.66 | 104.22,105.66 104.22,109.34 C17.2 105.63,109.89 106.81,111.07 106.81,114.81 LED18.A | U9.4 101.79,105.34 102.11,105.66 104.22,105.66
N$74
  Top 0.254: SJ9.1 95.12,119.72 R-PROG18.2
N$75
  Top 0.254: 96.94,120.48 SJ9.3 96.9,119.72 R-PROG17.2
N$76
  Top 0.254: 97.03,120.52 95.89,120.52
N$77
  Top 0.508: U9.1 99.89,102.68 100.84,103.63 100.84,108.12 R9.2
N$78
  Top 0.254: LED17.C 102.62,118.99 LED18.K R9.1
N$79
  Top 0.61: D17.A 113.53,93.85 X9.VBUS
N$80
  Top 0.508: J26.2 96.52,111.74 | 96.52,111.74 98.03,111.74 JP80.2 | J27.2 96.12,96.5 96.52,96.9 96.52,97.66 | 96.52,97.66 96.52,111.74 | 96.52,97.66 97.41,97.66 JP81.2 101.79,96.77 | U9.3 101.79,96.77 | C18.1 101.8,96.76 101.79,96.77
N$81
  Top 0.61: D18.A 108.92,99.77 111,101.85 115.43,101.85 J25.VIN0
PROG  (via drill 0.6)
  Top 0.508: SJ1.2 17.27,39.78 21.08,35.97 21.08,28.45 | U1.5 21.08,27.27 21.08,28.45 | v19.56,28.45 21.08,28.45
  Bottom 0.508: PROG.P$2 16.03,24.92 v19.56,28.45
PROG1  (via drill 0.6)
  Top 0.508: SJ2.2 56.64,39.78 60.45,35.97 60.45,28.45 | U2.5 60.45,27.27 60.45,28.45 | v58.93,28.45 60.45,28.45
  Bottom 0.508: PROG1.P$2 55.4,24.92 v58.93,28.45
PROG2  (via drill 0.6)
  Top 0.508: SJ3.2 96.01,39.78 99.82,35.97 99.82,28.45 | U3.5 99.82,27.27 99.82,28.45 | v98.3,28.45 99.82,28.45
  Bottom 0.508: PROG2.P$2 94.77,24.92 v98.3,28.45
PROG3  (via drill 0.6)
  Top 0.508: SJ4.2 17.27,78.38 21.08,74.57 21.08,67.06 | U4.5 21.08,65.88 21.08,67.06 | v19.56,67.06 21.08,67.06
  Bottom 0.508: PROG3.P$2 16.03,63.52 v19.56,67.06
PROG4  (via drill 0.6)
  Top 0.508: SJ5.2 56.64,78.38 60.45,74.57 60.45,67.06 | U5.5 60.45,65.88 60.45,67.06 | v58.93,67.06 60.45,67.06
  Bottom 0.508: PROG4.P$2 55.4,63.52 v58.93,67.06
PROG5  (via drill 0.6)
  Top 0.508: SJ6.2 96.01,78.38 99.82,74.57 99.82,67.06 | U6.5 99.82,65.88 99.82,67.06 | v98.3,67.06 99.82,67.06
  Bottom 0.508: PROG5.P$2 94.77,63.52 v98.3,67.06
PROG6  (via drill 0.6)
  Top 0.508: SJ7.2 17.27,116.99 21.08,113.18 21.08,105.66 | U7.5 21.08,104.49 21.08,105.66 | v19.56,105.66 21.08,105.66
  Bottom 0.508: PROG6.P$2 16.03,102.13 v19.56,105.66
PROG7  (via drill 0.6)
  Top 0.508: SJ8.2 56.64,116.99 60.45,113.18 60.45,105.66 | U8.5 60.45,104.49 60.45,105.66 | v58.93,105.66 60.45,105.66
  Bottom 0.508: PROG7.P$2 55.4,102.13 v58.93,105.66
PROG8  (via drill 0.6)
  Top 0.508: SJ9.2 96.01,116.99 99.82,113.18 99.82,105.66 | U9.5 99.82,104.49 99.82,105.66 | v98.3,105.66 99.82,105.66
  Bottom 0.508: PROG8.P$2 94.77,102.13 v98.3,105.66

## Text on the board
Bottom: V20 | V20 | V20 | V20 | V20 | V20 | V20 | V20 | V20
Dimension: Route Out | Route Out | Route Out | Route Out | Route Out | Route Out | Route Out | Route Out | Route Out | Route Out | Route Out | Route Out | Route Out | Route Out | Route Out | Route Out | Route Out | Route Out
tPlace: 100 | 500 | Charging | 100 | 500 | Charging | 100 | 500 | Charging | mA | mA | mA | mA | mA | mA | 6V Max | 6V Max | 6V Max | SYS OUT | SYS OUT | SYS OUT | PROG | PROG | PROG | BATT IN | BATT IN | BATT IN | LiPo USB Charger | LiPo USB Charger | LiPo USB Charger | 100 | 500 | Charging | 100 | 500 | Charging | 100 | 500 | Charging | mA | mA | mA | mA | mA | mA | 6V Max | 6V Max | 6V Max | SYS OUT | SYS OUT | SYS OUT | PROG | PROG | PROG | BATT IN | BATT IN | BATT IN | LiPo USB Charger | LiPo USB Charger | LiPo USB Charger | 100 | 500 | Charging | 100 | 500 | Charging | 100 | 500 | Charging | mA | mA | mA | mA | mA | mA | 6V Max | 6V Max | 6V Max | SYS OUT | SYS OUT | SYS OUT | PROG | PROG | PROG | BATT IN | BATT IN | BATT IN | LiPo USB Charger | LiPo USB Charger | LiPo USB Charger